# EAGLE board Battery_Stay (EAGLE 9.1.3)
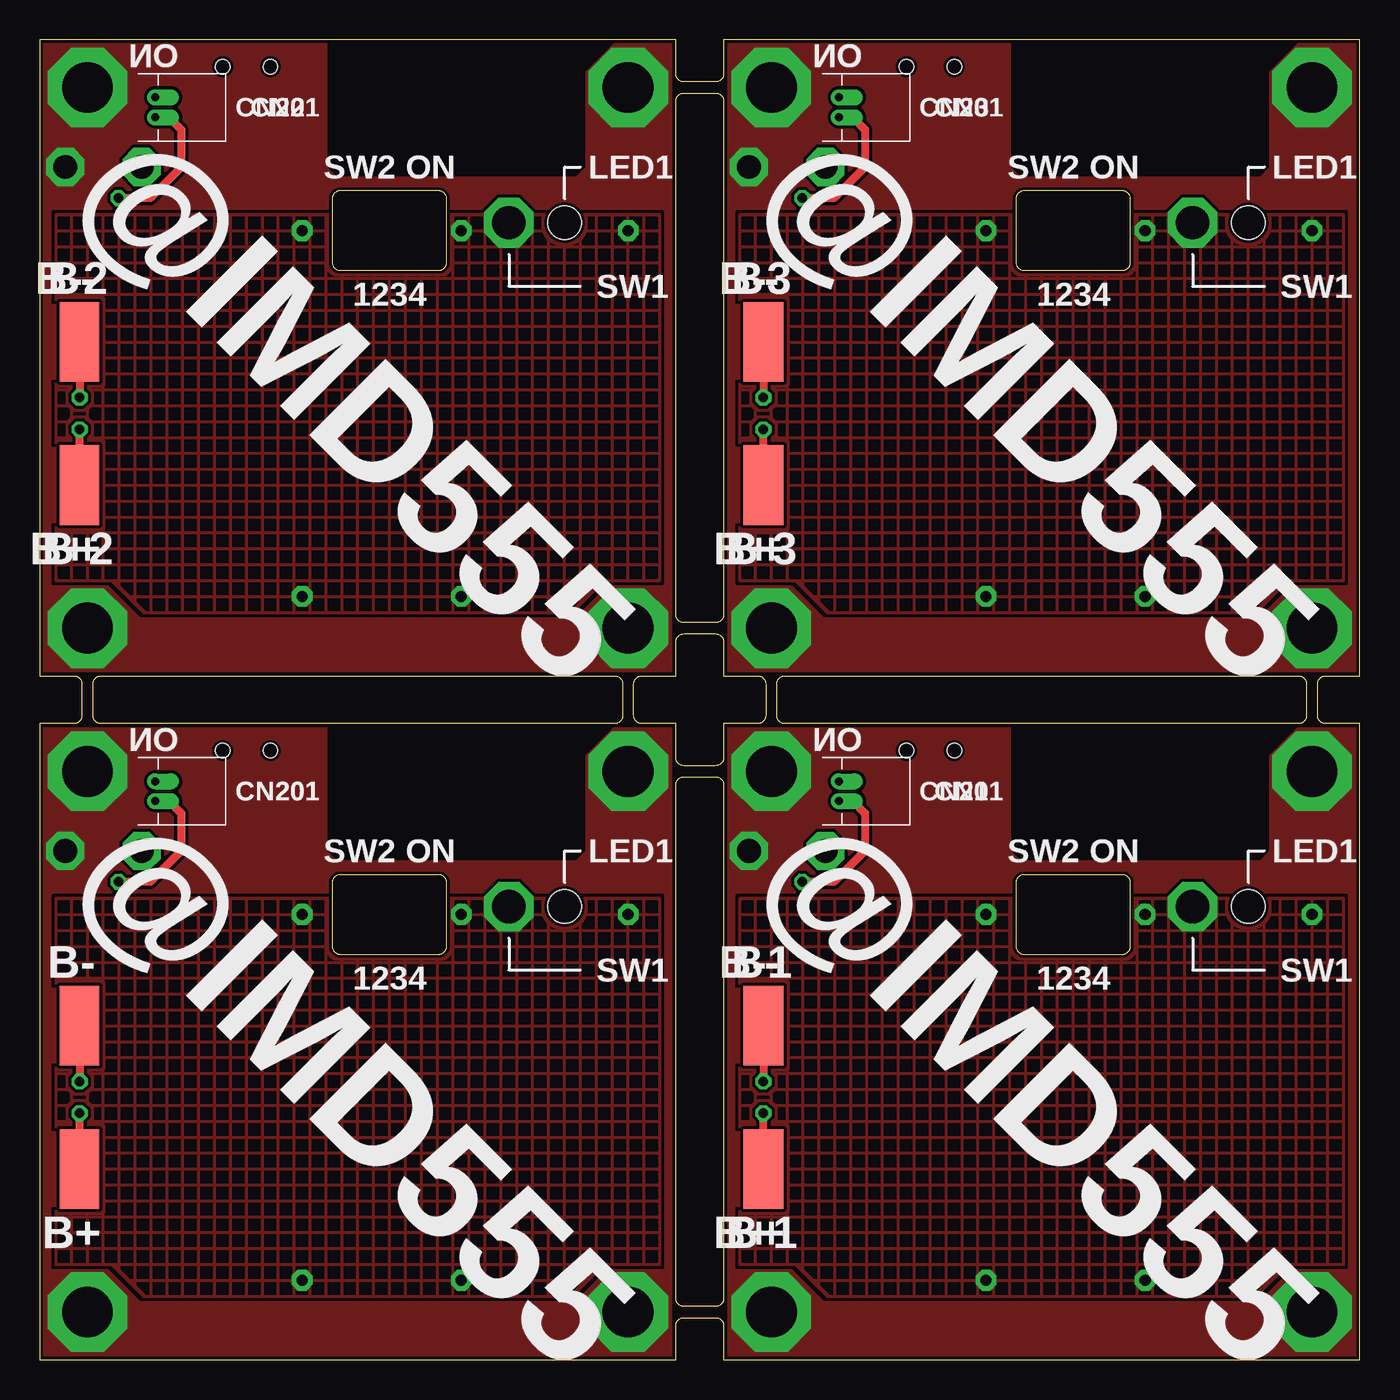
[diagram p0: board, top side]
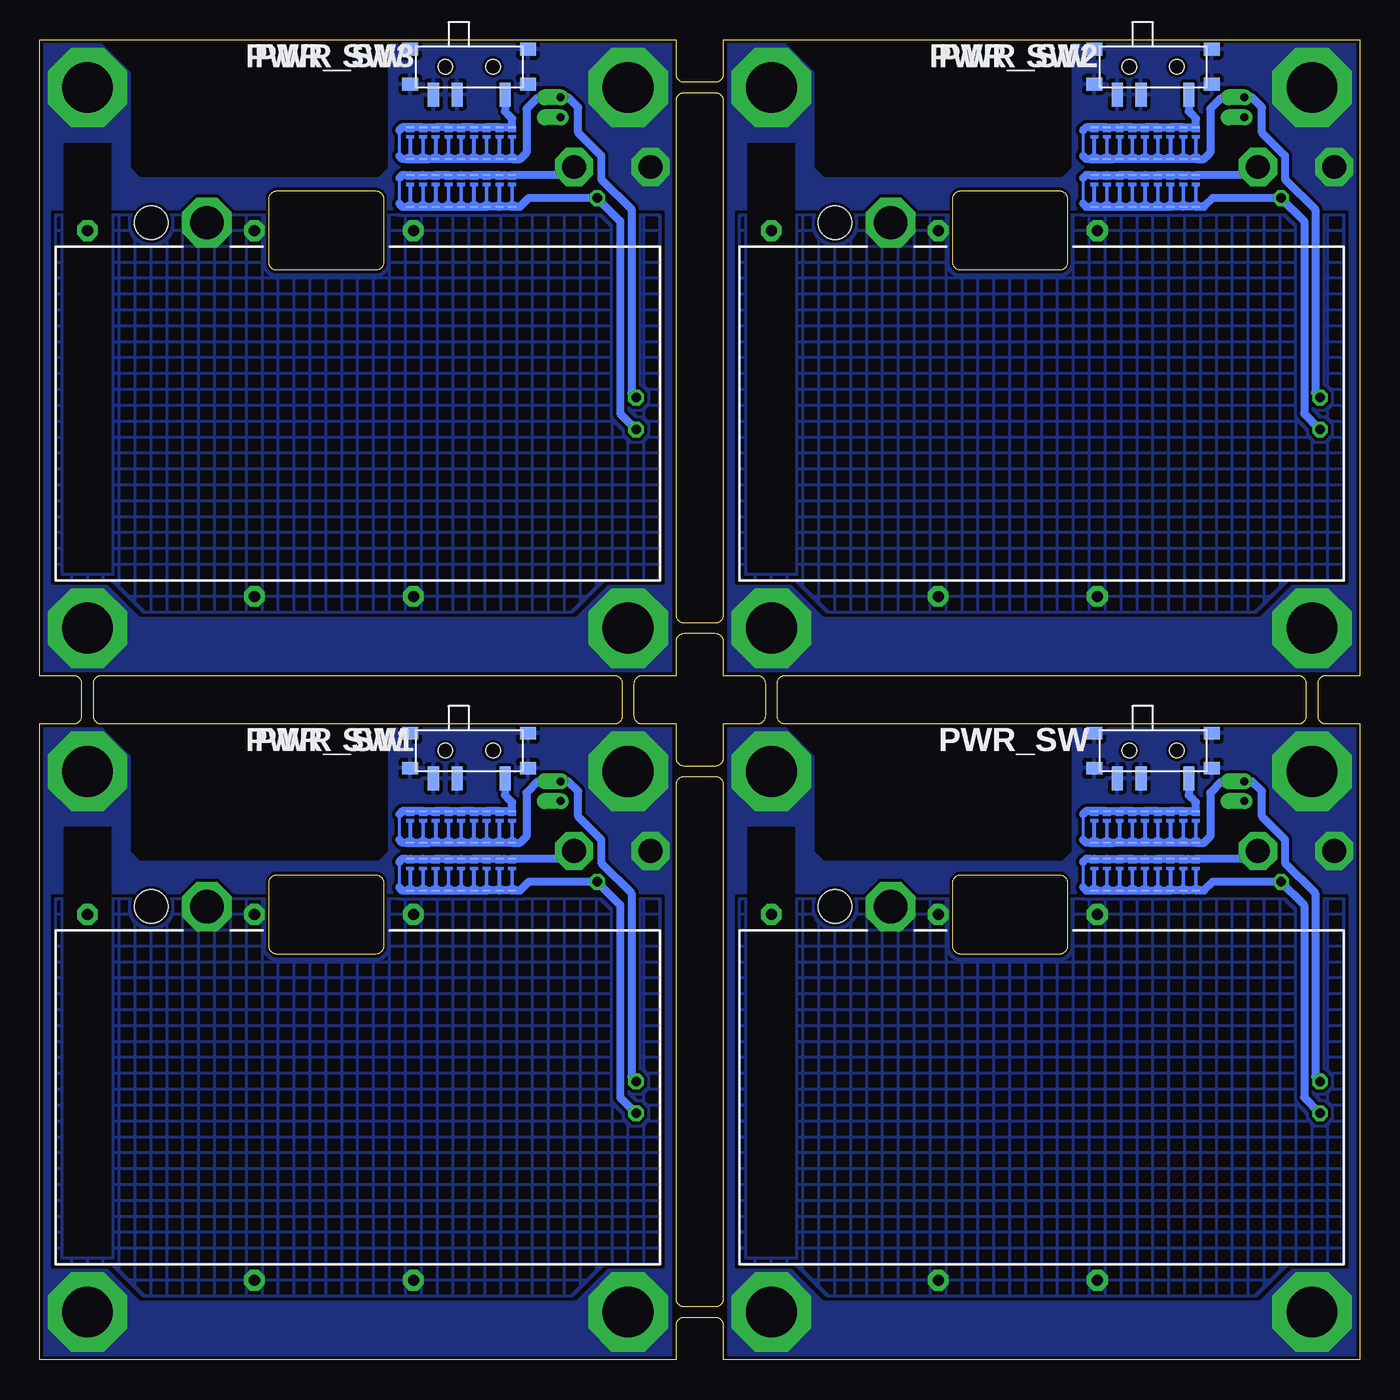
[diagram p1: board, bottom side, seen from below]

Size 83 x 83 mm. Coordinates in mm from the lower left corner, seen from the top.
Outline: 43,0 83,0 83,40 80.85,40 arc-90 80.35,40.5 80.35,42.5 arc-90 80.85,43 83,43 83,83 43,83 43,80.85 arc-90 42.5,80.35 40.5,80.35 arc-90 40,80.85 40,83 0,83 0,43 2.15,43 arc-90 2.65,42.5 2.65,40.5 arc-90 2.15,40 0,40 0,0 40,0 40,2.15 arc-90 40.5,2.65 42.5,2.65 arc-90 43,2.15 43,0
Outline: 79.15,40 46.85,40 arc-90 46.35,40.5 46.35,42.5 arc-90 46.85,43 79.15,43 arc-90 79.65,42.5 79.65,40.5 arc-90 79.15,40
Outline: 45.15,40 43,40 43,37.85 arc-90 42.5,37.35 40.5,37.35 arc-90 40,37.85 40,40 37.85,40 arc-90 37.35,40.5 37.35,42.5 arc-90 37.85,43 40,43 40,45.15 arc-90 40.5,45.65 42.5,45.65 arc-90 43,45.15 43,43 45.15,43 arc-90 45.65,42.5 45.65,40.5 arc-90 45.15,40
Outline: 43,36.15 43,3.85 arc-90 42.5,3.35 40.5,3.35 arc-90 40,3.85 40,36.15 arc-90 40.5,36.65 42.5,36.65 arc-90 43,36.15
Outline: 36.15,40 3.85,40 arc-90 3.35,40.5 3.35,42.5 arc-90 3.85,43 36.15,43 arc-90 36.65,42.5 36.65,40.5 arc-90 36.15,40
Outline: 40,46.85 40,79.15 arc-90 40.5,79.65 42.5,79.65 arc-90 43,79.15 43,46.85 arc-90 42.5,46.35 40.5,46.35 arc-90 40,46.85
Outline: 61.38,73 61.38,69 arc90 61.88,68.5 68.08,68.5 arc90 68.58,69 68.58,73 arc90 68.08,73.5 61.88,73.5 arc90 61.38,73
Outline: 18.39,30 18.39,26 arc90 18.89,25.5 25.09,25.5 arc90 25.59,26 25.59,30 arc90 25.09,30.5 18.89,30.5 arc90 18.39,30
Outline: 61.38,30 61.38,26 arc90 61.88,25.5 68.08,25.5 arc90 68.58,26 68.58,30 arc90 68.08,30.5 61.88,30.5 arc90 61.38,30
Outline: 18.39,73 18.39,69 arc90 18.89,68.5 25.09,68.5 arc90 25.59,69 25.59,73 arc90 25.09,73.5 18.89,73.5 arc90 18.39,73
Copper layers (1*16): Top 0.035mm / dielectric 1.5mm / Bottom 0.035mm
Design rules "SeeedStudio_2layer_DRU_no_angle_20140221_IMD555": minimum track width 0.2mm, minimum drill 0.3mm, track to track 0.2mm, track to pad 0.2mm, pad to pad 0.2mm, via to via 0.2mm, smd to smd 0mil, copper to edge 0.2mm, drill to drill 10mil, minimum pad ring 0.25mm, minimum via ring 0.2mm, stop-mask expansion 0.03mm, vias tented up to drill 5mm, thermal gap 10mil
Holes 2.1 mm at 33,28.5 76,28.5 33,71.5 76,71.5
tRestrict: area 0,39.8 to 83,43.2; area 39.8,0 to 43.2,83; area 61.2,74.5 to 79.2,83; area 18.2,31.5 to 36.2,40; area 61.2,31.5 to 79.2,40; area 18.2,74.5 to 36.2,83; area 18.2,31.5 to 36.2,40; area 61.2,31.5 to 79.2,40; area 18.2,74.5 to 36.2,83; area 61.2,74.5 to 79.2,83
bRestrict: area 78.5,49.5 to 81.5,76.5; area 61.2,74.5 to 79.2,83; area 35.5,6.5 to 38.5,33.5; area 18.2,31.5 to 36.2,40; area 78.5,6.5 to 81.5,33.5; area 61.2,31.5 to 79.2,40; area 35.5,49.5 to 38.5,76.5; area 18.2,74.5 to 36.2,83; area 0,39.8 to 83,43.2; area 39.8,0 to 43.2,83; area 35.5,6.5 to 38.5,33.5; area 18.2,31.5 to 36.2,40; area 78.5,6.5 to 81.5,33.5; area 61.2,31.5 to 79.2,40; area 35.5,49.5 to 38.5,76.5; area 18.2,74.5 to 36.2,83; area 78.5,49.5 to 81.5,76.5; area 61.2,74.5 to 79.2,83

## Footprints (pad centres in the part's own frame; a part is rotated, then mirrored left to right if it is on the bottom)
SMD2,5-5 = smd 2.5 x 5: 1 0,0
53048-0210 = drill 0.5 pad 1 offset: 1 0.625,0; 2 -0.625,0
FUSE_PAT1 = smd 0.1 x 0.5: P$1 -1,0; P$2 1,0
MA12R = smd 0.7 x 1.5: P$1 -2.25,1.75; P$2 0.75,1.75; P$3 2.25,1.75 | smd 1 x 0.8: P$4 -3.7,1.1; P$5 -3.7,-1.1; P$6 3.7,-1.1; P$7 3.7,1.1 | hole 0.9: -1.5,0; 1.5,0

## Placement (x,y rotation side)
B+  +  [SMD2,5-5]  2.5,12 0 top
B+1  +  [SMD2,5-5]  45.5,12 0 top
B+2  +  [SMD2,5-5]  2.5,55 0 top
B+3  +  [SMD2,5-5]  45.5,55 0 top
B-  -  [SMD2,5-5]  2.5,21 0 top
B-1  -  [SMD2,5-5]  45.5,21 0 top
B-2  -  [SMD2,5-5]  2.5,64 0 top
B-3  -  [SMD2,5-5]  45.5,64 0 top
CN1  [53048-0210]  50.25,35.75 270 top
CN2  [53048-0210]  7.25,78.75 270 top
CN3  [53048-0210]  50.25,78.75 270 top
CN201  [53048-0210]  7.25,35.75 270 top
F1  FUSEPAT0.2  [FUSE_PAT1]  16.7,33.5 270 bottom
F2  FUSEPAT0.2  [FUSE_PAT1]  15.9,33.5 270 bottom
F3  FUSEPAT0.2  [FUSE_PAT1]  15.1,33.5 270 bottom
F4  FUSEPAT0.2  [FUSE_PAT1]  14.3,33.5 270 bottom
F5  FUSEPAT0.2  [FUSE_PAT1]  13.5,33.5 270 bottom
F6  FUSEPAT0.2  [FUSE_PAT1]  12.7,33.5 270 bottom
F7  FUSEPAT0.2  [FUSE_PAT1]  16.7,30.5 270 bottom
F8  FUSEPAT0.2  [FUSE_PAT1]  15.9,30.5 270 bottom
F9  FUSEPAT0.2  [FUSE_PAT1]  15.1,30.5 270 bottom
F10  FUSEPAT0.2  [FUSE_PAT1]  14.3,30.5 270 bottom
F11  FUSEPAT0.2  [FUSE_PAT1]  13.5,30.5 270 bottom
F12  FUSEPAT0.2  [FUSE_PAT1]  12.7,30.5 270 bottom
F13  FUSEPAT0.2  [FUSE_PAT1]  11.9,33.5 270 bottom
F14  FUSEPAT0.2  [FUSE_PAT1]  11.1,33.5 270 bottom
F15  FUSEPAT0.2  [FUSE_PAT1]  10.3,33.5 270 bottom
F16  FUSEPAT0.2  [FUSE_PAT1]  59.7,33.5 270 bottom
F17  FUSEPAT0.2  [FUSE_PAT1]  11.9,30.5 270 bottom
F18  FUSEPAT0.2  [FUSE_PAT1]  11.1,30.5 270 bottom
F19  FUSEPAT0.2  [FUSE_PAT1]  10.3,30.5 270 bottom
F20  FUSEPAT0.2  [FUSE_PAT1]  57.3,30.5 270 bottom
F21  FUSEPAT0.2  [FUSE_PAT1]  56.5,30.5 270 bottom
F22  FUSEPAT0.2  [FUSE_PAT1]  55.7,30.5 270 bottom
F23  FUSEPAT0.2  [FUSE_PAT1]  58.9,33.5 270 bottom
F24  FUSEPAT0.2  [FUSE_PAT1]  58.1,33.5 270 bottom
F25  FUSEPAT0.2  [FUSE_PAT1]  57.3,33.5 270 bottom
F26  FUSEPAT0.2  [FUSE_PAT1]  56.5,33.5 270 bottom
F27  FUSEPAT0.2  [FUSE_PAT1]  55.7,33.5 270 bottom
F28  FUSEPAT0.2  [FUSE_PAT1]  59.7,30.5 270 bottom
F29  FUSEPAT0.2  [FUSE_PAT1]  58.9,30.5 270 bottom
F30  FUSEPAT0.2  [FUSE_PAT1]  58.1,30.5 270 bottom
F31  FUSEPAT0.2  [FUSE_PAT1]  54.9,33.5 270 bottom
F32  FUSEPAT0.2  [FUSE_PAT1]  54.1,33.5 270 bottom
F33  FUSEPAT0.2  [FUSE_PAT1]  53.3,33.5 270 bottom
F34  FUSEPAT0.2  [FUSE_PAT1]  54.9,30.5 270 bottom
F35  FUSEPAT0.2  [FUSE_PAT1]  54.1,30.5 270 bottom
F36  FUSEPAT0.2  [FUSE_PAT1]  53.3,30.5 270 bottom
F37  FUSEPAT0.2  [FUSE_PAT1]  16.7,76.5 270 bottom
F38  FUSEPAT0.2  [FUSE_PAT1]  14.3,73.5 270 bottom
F39  FUSEPAT0.2  [FUSE_PAT1]  13.5,73.5 270 bottom
F40  FUSEPAT0.2  [FUSE_PAT1]  12.7,73.5 270 bottom
F41  FUSEPAT0.2  [FUSE_PAT1]  15.9,76.5 270 bottom
F42  FUSEPAT0.2  [FUSE_PAT1]  15.1,76.5 270 bottom
F43  FUSEPAT0.2  [FUSE_PAT1]  14.3,76.5 270 bottom
F44  FUSEPAT0.2  [FUSE_PAT1]  13.5,76.5 270 bottom
F45  FUSEPAT0.2  [FUSE_PAT1]  12.7,76.5 270 bottom
F46  FUSEPAT0.2  [FUSE_PAT1]  16.7,73.5 270 bottom
F47  FUSEPAT0.2  [FUSE_PAT1]  15.9,73.5 270 bottom
F48  FUSEPAT0.2  [FUSE_PAT1]  15.1,73.5 270 bottom
F49  FUSEPAT0.2  [FUSE_PAT1]  11.9,76.5 270 bottom
F50  FUSEPAT0.2  [FUSE_PAT1]  11.1,76.5 270 bottom
F51  FUSEPAT0.2  [FUSE_PAT1]  10.3,76.5 270 bottom
F52  FUSEPAT0.2  [FUSE_PAT1]  11.9,73.5 270 bottom
F53  FUSEPAT0.2  [FUSE_PAT1]  11.1,73.5 270 bottom
F54  FUSEPAT0.2  [FUSE_PAT1]  10.3,73.5 270 bottom
F55  FUSEPAT0.2  [FUSE_PAT1]  59.7,76.5 270 bottom
F56  FUSEPAT0.2  [FUSE_PAT1]  57.3,73.5 270 bottom
F57  FUSEPAT0.2  [FUSE_PAT1]  56.5,73.5 270 bottom
F58  FUSEPAT0.2  [FUSE_PAT1]  55.7,73.5 270 bottom
F59  FUSEPAT0.2  [FUSE_PAT1]  58.9,76.5 270 bottom
F60  FUSEPAT0.2  [FUSE_PAT1]  58.1,76.5 270 bottom
F61  FUSEPAT0.2  [FUSE_PAT1]  57.3,76.5 270 bottom
F62  FUSEPAT0.2  [FUSE_PAT1]  56.5,76.5 270 bottom
F63  FUSEPAT0.2  [FUSE_PAT1]  55.7,76.5 270 bottom
F64  FUSEPAT0.2  [FUSE_PAT1]  59.7,73.5 270 bottom
F65  FUSEPAT0.2  [FUSE_PAT1]  58.9,73.5 270 bottom
F66  FUSEPAT0.2  [FUSE_PAT1]  58.1,73.5 270 bottom
F67  FUSEPAT0.2  [FUSE_PAT1]  54.9,76.5 270 bottom
F68  FUSEPAT0.2  [FUSE_PAT1]  54.1,76.5 270 bottom
F69  FUSEPAT0.2  [FUSE_PAT1]  53.3,76.5 270 bottom
F70  FUSEPAT0.2  [FUSE_PAT1]  54.9,73.5 270 bottom
F71  FUSEPAT0.2  [FUSE_PAT1]  54.1,73.5 270 bottom
F72  FUSEPAT0.2  [FUSE_PAT1]  53.3,73.5 270 bottom
PWR_SW  MA12R  [MA12R]  13,38.3 180 bottom
PWR_SW1  MA12R  [MA12R]  56,38.3 180 bottom
PWR_SW2  MA12R  [MA12R]  13,81.3 180 bottom
PWR_SW3  MA12R  [MA12R]  56,81.3 180 bottom

## Library data of the parts
B+ B+1-B+3 B- B-1-B-3 PWR_SW PWR_SW1-PWR_SW3 = 0 my parts
CN1-CN3 CN201 = 4 CONNECTOR
F1-F72 = 3 FUSE

## Nets
GND: PWR_SW.P$2 PWR_SW.P$3 PWR_SW.P$4 PWR_SW.P$5 PWR_SW.P$6 PWR_SW.P$7
GND1: PWR_SW1.P$2 PWR_SW1.P$3 PWR_SW1.P$4 PWR_SW1.P$5 PWR_SW1.P$6 PWR_SW1.P$7
GND2: PWR_SW2.P$2 PWR_SW2.P$3 PWR_SW2.P$4 PWR_SW2.P$5 PWR_SW2.P$6 PWR_SW2.P$7
GND3: PWR_SW3.P$2 PWR_SW3.P$3 PWR_SW3.P$4 PWR_SW3.P$5 PWR_SW3.P$6 PWR_SW3.P$7
N$1: F1.P$1 F2.P$1 F3.P$1 F4.P$1 F5.P$1 F6.P$1 F13.P$1 F14.P$1 F15.P$1 PWR_SW.P$1
N$2: B-.1 CN201.2 F1.P$2 F2.P$2 F3.P$2 F4.P$2 F5.P$2 F6.P$2 F13.P$2 F14.P$2 F15.P$2
N$3: F7.P$1 F8.P$1 F9.P$1 F10.P$1 F11.P$1 F12.P$1 F17.P$1 F18.P$1 F19.P$1
N$4: B+.1 CN201.1 F7.P$2 F8.P$2 F9.P$2 F10.P$2 F11.P$2 F12.P$2 F17.P$2 F18.P$2 F19.P$2
N$6: F16.P$1 F23.P$1 F24.P$1 F25.P$1 F26.P$1 F27.P$1 F31.P$1 F32.P$1 F33.P$1 PWR_SW1.P$1
N$7: B-1.1 CN1.2 F16.P$2 F23.P$2 F24.P$2 F25.P$2 F26.P$2 F27.P$2 F31.P$2 F32.P$2 F33.P$2
N$8: F20.P$1 F21.P$1 F22.P$1 F28.P$1 F29.P$1 F30.P$1 F34.P$1 F35.P$1 F36.P$1
N$9: B+1.1 CN1.1 F20.P$2 F21.P$2 F22.P$2 F28.P$2 F29.P$2 F30.P$2 F34.P$2 F35.P$2 F36.P$2
N$11: F37.P$1 F41.P$1 F42.P$1 F43.P$1 F44.P$1 F45.P$1 F49.P$1 F50.P$1 F51.P$1 PWR_SW2.P$1
N$12: B-2.1 CN2.2 F37.P$2 F41.P$2 F42.P$2 F43.P$2 F44.P$2 F45.P$2 F49.P$2 F50.P$2 F51.P$2
N$13: F38.P$1 F39.P$1 F40.P$1 F46.P$1 F47.P$1 F48.P$1 F52.P$1 F53.P$1 F54.P$1
N$14: B+2.1 CN2.1 F38.P$2 F39.P$2 F40.P$2 F46.P$2 F47.P$2 F48.P$2 F52.P$2 F53.P$2 F54.P$2
N$16: F55.P$1 F59.P$1 F60.P$1 F61.P$1 F62.P$1 F63.P$1 F67.P$1 F68.P$1 F69.P$1 PWR_SW3.P$1
N$17: B-3.1 CN3.2 F55.P$2 F59.P$2 F60.P$2 F61.P$2 F62.P$2 F63.P$2 F67.P$2 F68.P$2 F69.P$2
N$18: F56.P$1 F57.P$1 F58.P$1 F64.P$1 F65.P$1 F66.P$1 F70.P$1 F71.P$1 F72.P$1
N$19: B+3.1 CN3.1 F56.P$2 F57.P$2 F58.P$2 F64.P$2 F65.P$2 F66.P$2 F70.P$2 F71.P$2 F72.P$2

## Tracks (layer width: path | path; a pad name or v marks a point on that pad's centre or on a via)
GND  (via drill 1.5 pad 2.4, 3.2 pad 5)
  other vias: 3,37 37,37 37,3 3,3 1.6,32
  pour Bottom (rank 6): 0,40 40,40 40,0 0,0
  pour Top (rank 6): 0,40 40,40 40,0 0,0
GND1  (via drill 1.5 pad 2.4, 3.2 pad 5)
  other vias: 46,37 80,37 80,3 46,3 44.6,32
  pour Bottom (rank 6): 43,40 83,40 83,0 43,0
  pour Top (rank 6): 43,40 83,40 83,0 43,0
GND2  (via drill 1.5 pad 2.4, 3.2 pad 5)
  other vias: 3,80 37,80 37,46 3,46 1.6,75
  pour Bottom (rank 6): 0,83 40,83 40,43 0,43
  pour Top (rank 6): 0,83 40,83 40,43 0,43
GND3  (via drill 1.5 pad 2.4, 3.2 pad 5)
  other vias: 46,80 80,80 80,46 46,46 44.6,75
  pour Bottom (rank 6): 43,83 83,83 83,43 43,43
  pour Top (rank 6): 43,83 83,83 83,43 43,43
N$1
  Bottom 0.2: 17.4,34.3 17.4,32.7
  Bottom 0.5: 16.5,34.5 F2.P$1 F3.P$1 F4.P$1 F5.P$1 F6.P$1 F13.P$1 F14.P$1 F15.P$1 10.3,35.05 10.6,35.35 10.75,35.5 PWR_SW.P$1 | 16.5,34.5 F1.P$1 | 17,34.5 17.2,34.5 | 17.2,34.5 17.4,34.3 | 16.5,34.5 17.2,34.5
N$2  (via drill 0.6 pad 1)
  Top 0.5: B-.1 v2.5,17.5
  Bottom 0.5: v2.5,17.5 2.8,17.8 2.8,29.35 4.7,31.25 4.7,32.71 6.15,34.17 6.15,35.75 6.78,36.38 CN201.2 8.59,36.38 8.61,36.35 8.7,36.35 9.4,35.65 9.4,32.9 9.8,32.5 F15.P$2 F14.P$2 F13.P$2 F6.P$2 F5.P$2 F4.P$2 F3.P$2 15.5,32.5 | F1.P$2 F2.P$2 15.5,32.5 | 17.4,32.7 17.2,32.5 17,32.5 15.5,32.5
N$3  (via drill 1.5 pad 2.4)
  Bottom 0.2: 17.4,31.3 17.4,29.7
  Bottom 0.5: F7.P$1 F8.P$1 | F8.P$1 F9.P$1 F10.P$1 F11.P$1 F12.P$1 F17.P$1 F18.P$1 10.8,31.5 F19.P$1 6.9,31.5 v6.4,32 | 17.4,31.3 17.35,31.35 17.2,31.5 17,31.5 F8.P$1
N$4  (via drill 0.6 pad 1)
  Top 0.5: B+.1 v2.5,15.5 | CN201.1 8.12,35.12 8.9,34.35 8.9,32.05 8.9,32 6.95,30.05 v4.95,30.05
  Bottom 0.5: v2.5,15.5 3.5,16.5 3.5,28.6 v4.95,30.05 9.25,30.05 9.8,29.5 10.05,29.5 F19.P$2 F18.P$2 F17.P$2 F12.P$2 F11.P$2 F10.P$2 F9.P$2 F8.P$2 | F7.P$2 F8.P$2 | 17.4,29.7 17.2,29.5 F8.P$2
N$5  (via drill 0.7 pad 1.3, 2.1 pad 3)
  other vias: 16.5,28 26.5,28 16.5,5 26.5,5 37,28 29.5,28.5
  pour Top (hatched): 1,6 4.5,6 6.5,4 33.5,4 35.5,6 39,6 39,29 1,29
  pour Bottom (hatched): 1,6 4.5,6 6.5,4 33.5,4 35.5,6 39,6 39,29 1,29
N$6
  Bottom 0.2: 60.4,34.3 60.4,32.7
  Bottom 0.5: 59.5,34.5 F23.P$1 F24.P$1 F25.P$1 F26.P$1 F27.P$1 F31.P$1 F32.P$1 F33.P$1 53.3,35.05 53.6,35.35 53.75,35.5 PWR_SW1.P$1 | 59.5,34.5 F16.P$1 | 60,34.5 60.2,34.5 | 60.2,34.5 60.4,34.3 | 59.5,34.5 60.2,34.5
N$7  (via drill 0.6 pad 1)
  Top 0.5: B-1.1 v45.5,17.5
  Bottom 0.5: v45.5,17.5 45.8,17.8 45.8,29.35 47.7,31.25 47.7,32.71 49.15,34.17 49.15,35.75 49.77,36.38 CN1.2 51.59,36.38 51.61,36.35 51.7,36.35 52.4,35.65 52.4,32.9 52.8,32.5 F33.P$2 F32.P$2 F31.P$2 F27.P$2 F26.P$2 F25.P$2 F24.P$2 58.5,32.5 | F16.P$2 F23.P$2 58.5,32.5 | 60.4,32.7 60.2,32.5 60,32.5 58.5,32.5
N$8  (via drill 1.5 pad 2.4)
  Bottom 0.2: 60.4,31.3 60.4,29.7
  Bottom 0.5: F28.P$1 F29.P$1 | F29.P$1 F30.P$1 F20.P$1 F21.P$1 F22.P$1 F34.P$1 F35.P$1 53.8,31.5 F36.P$1 49.9,31.5 v49.4,32 | 60.4,31.3 60.35,31.35 60.2,31.5 60,31.5 F29.P$1
N$9  (via drill 0.6 pad 1)
  Top 0.5: B+1.1 v45.5,15.5 | CN1.1 51.12,35.12 51.9,34.35 51.9,32.05 51.9,32 49.95,30.05 v47.95,30.05
  Bottom 0.5: v45.5,15.5 46.5,16.5 46.5,28.6 v47.95,30.05 52.25,30.05 52.8,29.5 53.05,29.5 F36.P$2 F35.P$2 F34.P$2 F22.P$2 F21.P$2 F20.P$2 F30.P$2 F29.P$2 | F28.P$2 F29.P$2 | 60.4,29.7 60.2,29.5 F29.P$2
N$10  (via drill 0.7 pad 1.3, 2.1 pad 3)
  other vias: 59.5,28 69.5,28 59.5,5 69.5,5 80,28 72.5,28.5
  pour Top (hatched): 44,6 47.5,6 49.5,4 76.5,4 78.5,6 82,6 82,29 44,29
  pour Bottom (hatched): 44,6 47.5,6 49.5,4 76.5,4 78.5,6 82,6 82,29 44,29
N$11
  Bottom 0.2: 17.4,77.3 17.4,75.7
  Bottom 0.5: 16.5,77.5 F41.P$1 F42.P$1 F43.P$1 F44.P$1 F45.P$1 F49.P$1 F50.P$1 F51.P$1 10.3,78.05 10.6,78.35 10.75,78.5 PWR_SW2.P$1 | 16.5,77.5 F37.P$1 | 17,77.5 17.2,77.5 | 17.2,77.5 17.4,77.3 | 16.5,77.5 17.2,77.5
N$12  (via drill 0.6 pad 1)
  Top 0.5: B-2.1 v2.5,60.5
  Bottom 0.5: v2.5,60.5 2.8,60.8 2.8,72.35 4.7,74.25 4.7,75.71 6.15,77.17 6.15,78.75 6.78,79.38 CN2.2 8.59,79.38 8.61,79.35 8.7,79.35 9.4,78.65 9.4,75.9 9.8,75.5 F51.P$2 F50.P$2 F49.P$2 F45.P$2 F44.P$2 F43.P$2 F42.P$2 15.5,75.5 | F37.P$2 F41.P$2 15.5,75.5 | 17.4,75.7 17.2,75.5 17,75.5 15.5,75.5
N$13  (via drill 1.5 pad 2.4)
  Bottom 0.2: 17.4,74.3 17.4,72.7
  Bottom 0.5: F46.P$1 F47.P$1 | F47.P$1 F48.P$1 F38.P$1 F39.P$1 F40.P$1 F52.P$1 F53.P$1 10.8,74.5 F54.P$1 6.9,74.5 v6.4,75 | 17.4,74.3 17.35,74.35 17.2,74.5 17,74.5 F47.P$1
N$14  (via drill 0.6 pad 1)
  Top 0.5: B+2.1 v2.5,58.5 | CN2.1 8.12,78.12 8.9,77.35 8.9,75.05 8.9,75 6.95,73.05 v4.95,73.05
  Bottom 0.5: v2.5,58.5 3.5,59.5 3.5,71.6 v4.95,73.05 9.25,73.05 9.8,72.5 10.05,72.5 F54.P$2 F53.P$2 F52.P$2 F40.P$2 F39.P$2 F38.P$2 F48.P$2 F47.P$2 | F46.P$2 F47.P$2 | 17.4,72.7 17.2,72.5 F47.P$2
N$15  (via drill 0.7 pad 1.3, 2.1 pad 3)
  other vias: 16.5,71 26.5,71 16.5,48 26.5,48 37,71 29.5,71.5
  pour Top (hatched): 1,49 4.5,49 6.5,47 33.5,47 35.5,49 39,49 39,72 1,72
  pour Bottom (hatched): 1,49 4.5,49 6.5,47 33.5,47 35.5,49 39,49 39,72 1,72
N$16
  Bottom 0.2: 60.4,77.3 60.4,75.7
  Bottom 0.5: 59.5,77.5 F59.P$1 F60.P$1 F61.P$1 F62.P$1 F63.P$1 F67.P$1 F68.P$1 F69.P$1 53.3,78.05 53.6,78.35 53.75,78.5 PWR_SW3.P$1 | 59.5,77.5 F55.P$1 | 60,77.5 60.2,77.5 | 60.2,77.5 60.4,77.3 | 59.5,77.5 60.2,77.5
N$17  (via drill 0.6 pad 1)
  Top 0.5: B-3.1 v45.5,60.5
  Bottom 0.5: v45.5,60.5 45.8,60.8 45.8,72.35 47.7,74.25 47.7,75.71 49.15,77.17 49.15,78.75 49.77,79.38 CN3.2 51.59,79.38 51.61,79.35 51.7,79.35 52.4,78.65 52.4,75.9 52.8,75.5 F69.P$2 F68.P$2 F67.P$2 F63.P$2 F62.P$2 F61.P$2 F60.P$2 58.5,75.5 | F55.P$2 F59.P$2 58.5,75.5 | 60.4,75.7 60.2,75.5 60,75.5 58.5,75.5
N$18  (via drill 1.5 pad 2.4)
  Bottom 0.2: 60.4,74.3 60.4,72.7
  Bottom 0.5: F64.P$1 F65.P$1 | F65.P$1 F66.P$1 F56.P$1 F57.P$1 F58.P$1 F70.P$1 F71.P$1 53.8,74.5 F72.P$1 49.9,74.5 v49.4,75 | 60.4,74.3 60.35,74.35 60.2,74.5 60,74.5 F65.P$1
N$19  (via drill 0.6 pad 1)
  Top 0.5: B+3.1 v45.5,58.5 | CN3.1 51.12,78.12 51.9,77.35 51.9,75.05 51.9,75 49.95,73.05 v47.95,73.05
  Bottom 0.5: v45.5,58.5 46.5,59.5 46.5,71.6 v47.95,73.05 52.25,73.05 52.8,72.5 53.05,72.5 F72.P$2 F71.P$2 F70.P$2 F58.P$2 F57.P$2 F56.P$2 F66.P$2 F65.P$2 | F64.P$2 F65.P$2 | 60.4,72.7 60.2,72.5 F65.P$2
N$20  (via drill 0.7 pad 1.3, 2.1 pad 3)
  other vias: 59.5,71 69.5,71 59.5,48 69.5,48 80,71 72.5,71.5
  pour Top (hatched): 44,49 47.5,49 49.5,47 76.5,47 78.5,49 82,49 82,72 44,72
  pour Bottom (hatched): 44,49 47.5,49 49.5,47 76.5,47 78.5,49 82,49 82,72 44,72

## Text on the board
tPlace: ON | ON | SW2 ON | LED1 | SW2 ON | LED1 | SW1 | SW1 | 1234 | 1234 | @IMD555 | @IMD555 | ON | ON | SW2 ON | LED1 | SW2 ON | LED1 | 1234 | SW1 | 1234 | SW1 | @IMD555 | @IMD555
_tNames: CN201 | CN201 | B- | B- | B+ | B+ | CN201 | CN201 | B- | B- | B+ | B+
_bNames: PWR_SW | PWR_SW | PWR_SW | PWR_SW